# EAGLE board PCB FERNANO (EAGLE 9.7.0)
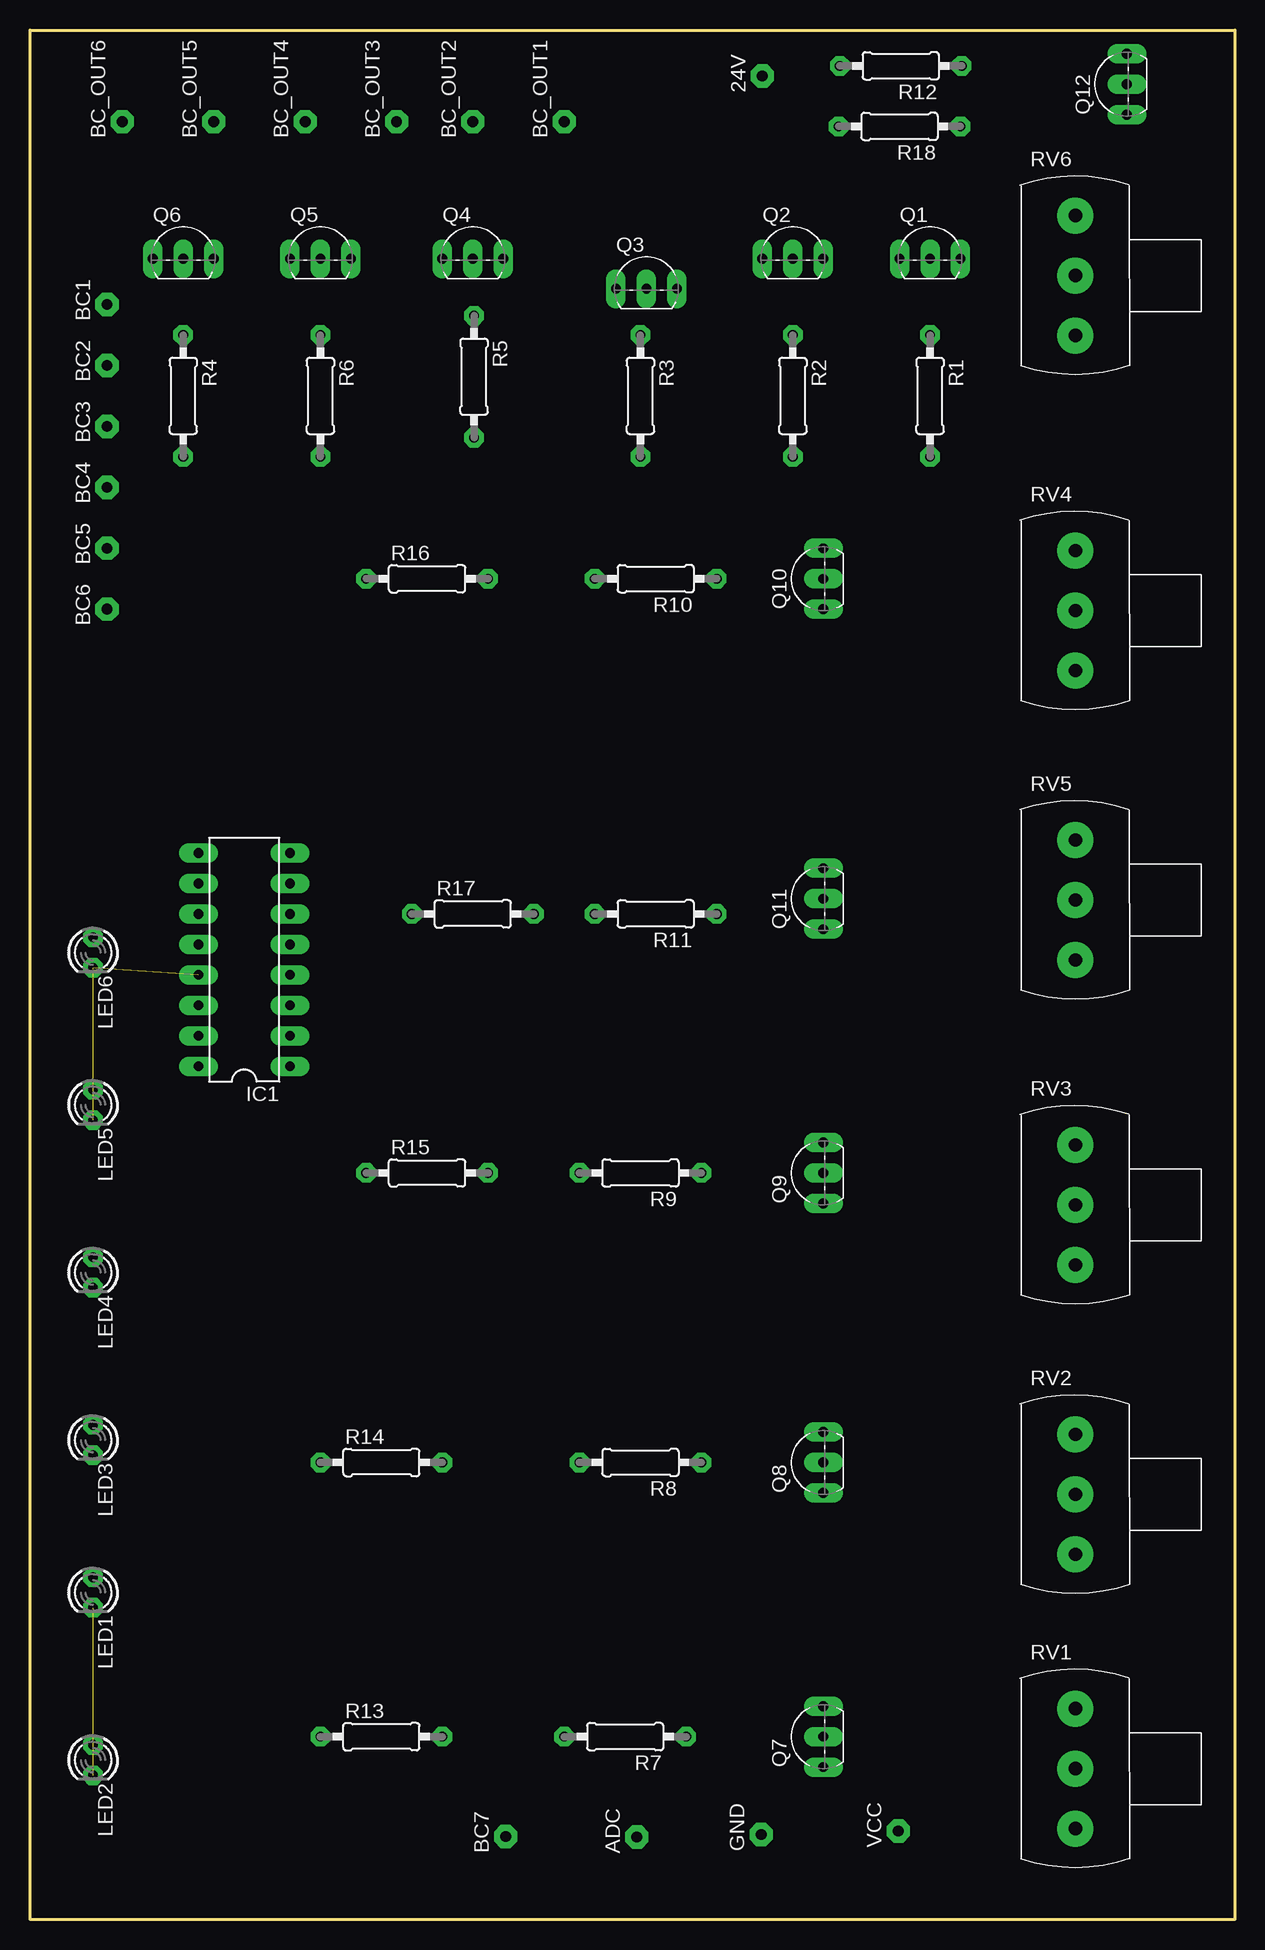
[diagram p0: board, top side]
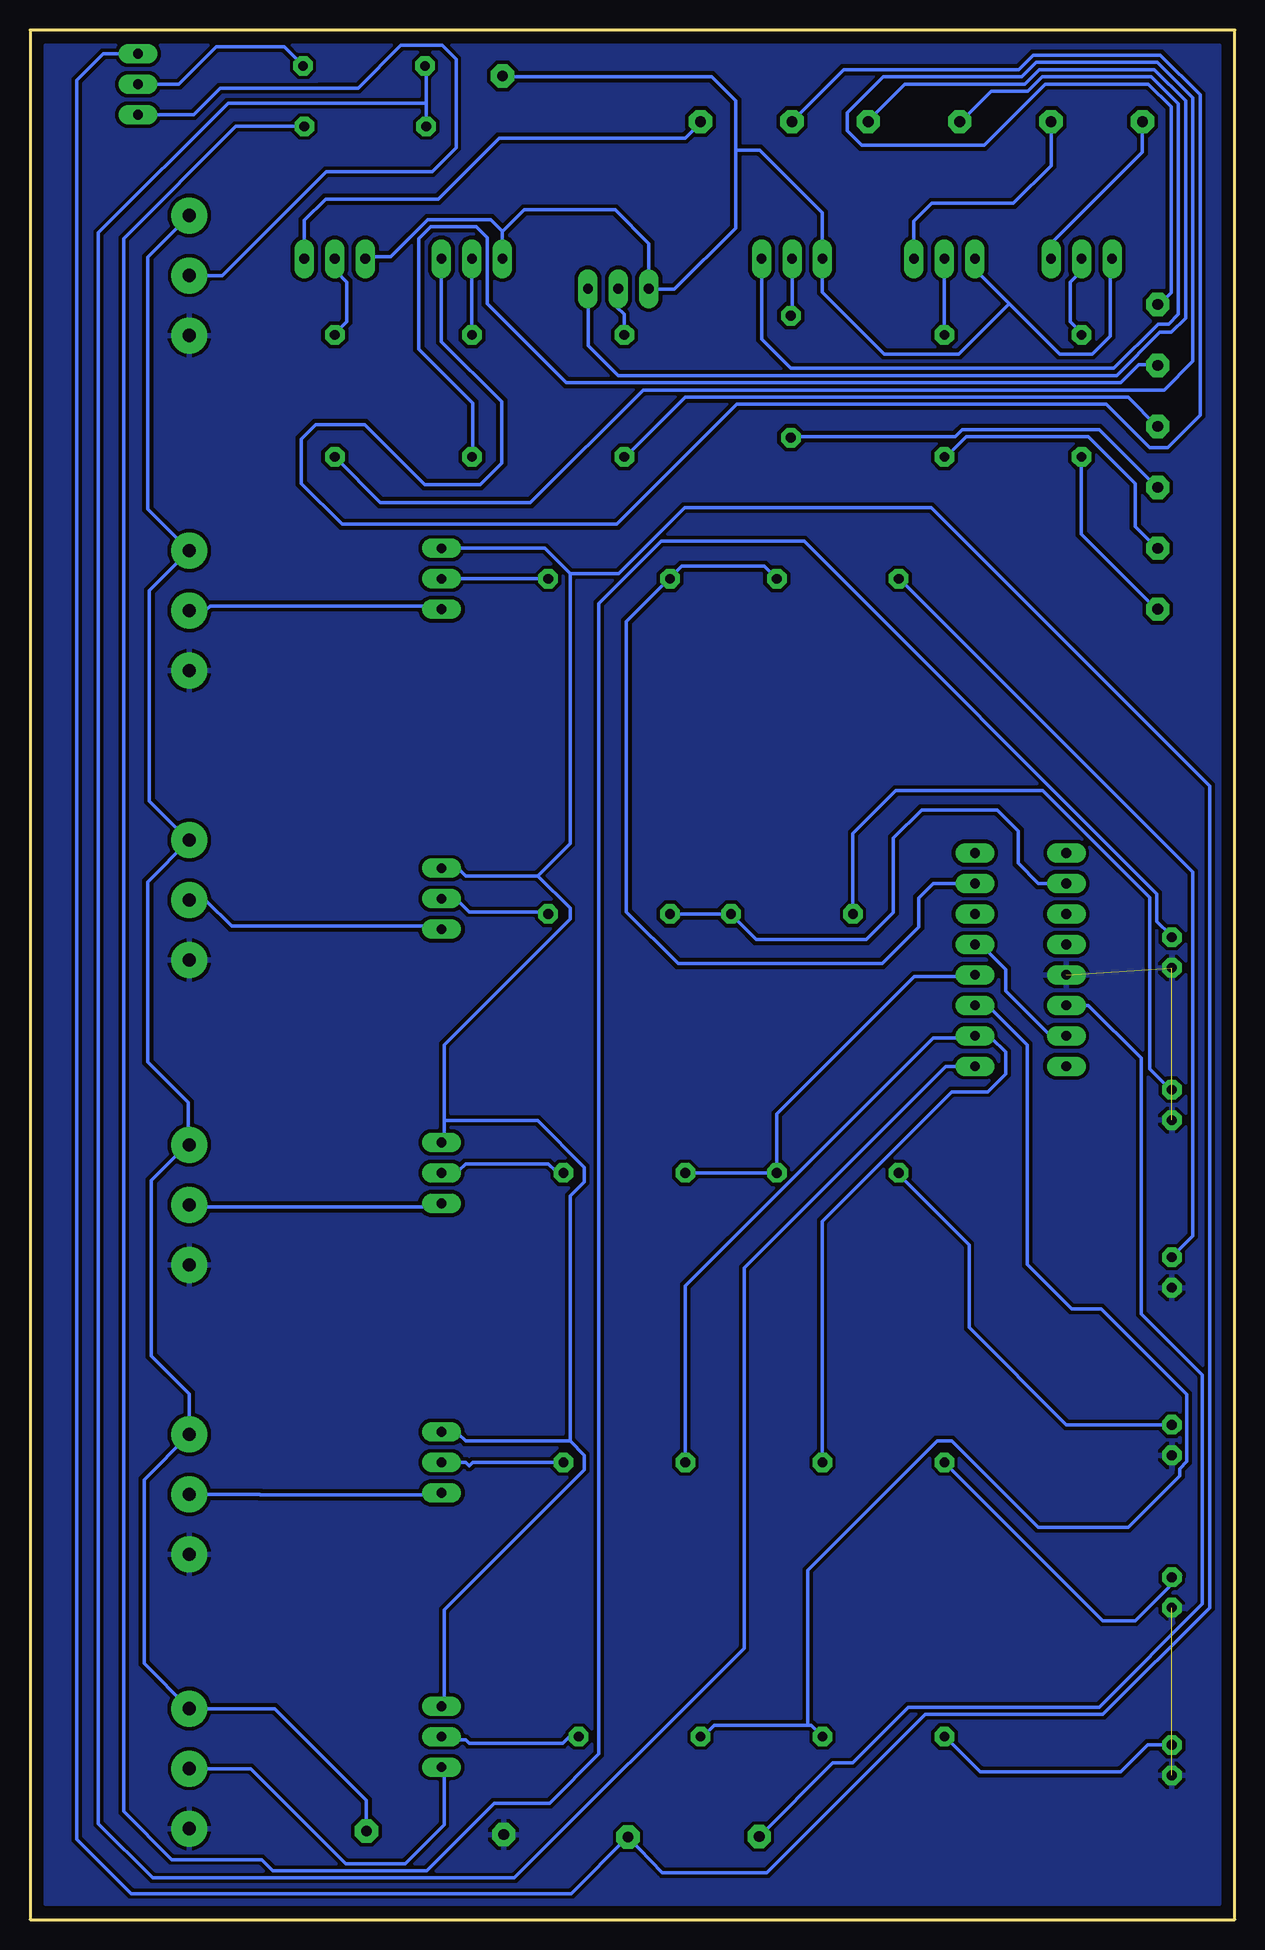
[diagram p1: board, bottom side, seen from below]

Size 100.4 x 157.5 mm. Coordinates in mm from the lower left corner, seen from the top.
Outline: 100.4,0 0,0 0,157.5 100.4,157.5 100.4,0
Copper layers (1*16): Top / Bottom
Stack-up Default Layer Stack: Top User Defined 0.035mm / Dielectric-1 User Defined 1.5mm / Bottom User Defined 0.035mm
Design rules: minimum copper width 0.3mm, minimum drill size 0.5mm, copper clearance wire_polygon to wire_polygon 0.3mm, copper clearance wire_polygon to pad_smd 0.3mm, copper clearance wire_polygon to via 0.3mm, copper clearance pad_smd to pad_smd 0.3mm, copper clearance pad_smd to via 0.3mm, copper clearance via to via 0.3mm, copper clearance smd to pad (same net) 6mil, copper clearance smd to via (same net) 6mil, copper clearance smd to smd (same net) 6mil, dimension clearance 40mil, restrict clearance 0mil, via restrict clearance 0mil, drill distance 0.2mm, keepout clearance 0mil

## Footprints (pad centres in the part's own frame; a part is rotated, then mirrored left to right if it is on the bottom)
PIN = drill 0.9 pad 1.93 octagon: 1 0,0
DIL16 = drill 0.813 long: 1 -8.89,-3.81; 2 -6.35,-3.81; 3 -3.81,-3.81; 4 -1.27,-3.81; 5 1.27,-3.81; 6 3.81,-3.81; 7 6.35,-3.81; 8 8.89,-3.81; 9 8.89,3.81; 10 6.35,3.81; 11 3.81,3.81; 12 1.27,3.81; 13 -1.27,3.81; 14 -3.81,3.81; 15 -6.35,3.81; 16 -8.89,3.81
LED3MM = drill 0.813 octagon: A -1.27,0; K 1.27,0
TO92-EBC = drill 0.813 long: B 0,-1.27; C -2.54,-1.27; E 2.54,-1.27
0207/10 = drill 0.813 octagon: 1 -5.08,0; 2 5.08,0
POTENCIOMETRO = drill 1.1 pad 3: P$1 4.5,12.5; P$2 4.5,7.5; P$3 4.5,2.5

## Placement (x,y rotation side)
24V  TESTPOINT  [PIN]  61.03,153.67 90 top
ADC  TESTPOINT  [PIN]  50.57,6.88 90 top
BC1  TESTPOINT  [PIN]  6.42,134.62 90 top
BC2  TESTPOINT  [PIN]  6.42,129.54 90 top
BC3  TESTPOINT  [PIN]  6.42,124.46 90 top
BC4  TESTPOINT  [PIN]  6.42,119.38 90 top
BC5  TESTPOINT  [PIN]  6.42,114.3 90 top
BC6  TESTPOINT  [PIN]  6.42,109.22 90 top
BC7  TESTPOINT  [PIN]  39.64,6.91 90 top
BC_OUT1  TESTPOINT  [PIN]  44.52,149.86 90 top
BC_OUT2  TESTPOINT  [PIN]  36.9,149.86 90 top
BC_OUT3  TESTPOINT  [PIN]  30.55,149.86 90 top
BC_OUT4  TESTPOINT  [PIN]  22.93,149.86 90 top
BC_OUT5  TESTPOINT  [PIN]  15.31,149.86 90 top
BC_OUT6  TESTPOINT  [PIN]  7.69,149.86 90 top
GND  TESTPOINT  [PIN]  60.93,7.08 90 top
IC1  4017N  [DIL16]  17.85,80.01 90 top
LED1  [LED3MM]  5.25,27.26 270 top
LED2  [LED3MM]  5.25,13.29 270 top
LED3  [LED3MM]  5.25,39.96 270 top
LED4  [LED3MM]  5.25,53.93 270 top
LED5  [LED3MM]  5.25,67.9 270 top
LED6  [LED3MM]  5.25,80.6 270 top
Q1  BC548  [TO92-EBC]  75,139.7 0 top
Q2  BC548  [TO92-EBC]  63.57,139.7 0 top
Q3  BC548  [TO92-EBC]  51.37,137.2 0 top
Q4  BC548  [TO92-EBC]  36.9,139.7 0 top
Q5  BC548  [TO92-EBC]  24.2,139.7 0 top
Q6  BC548  [TO92-EBC]  12.77,139.7 0 top
Q7  BC548  [TO92-EBC]  64.84,15.24 90 top
Q8  BC548  [TO92-EBC]  64.84,38.1 90 top
Q9  BC548  [TO92-EBC]  64.84,62.23 90 top
Q10  BC548  [TO92-EBC]  64.84,111.76 90 top
Q11  BC548  [TO92-EBC]  64.84,85.09 90 top
Q12  BC548  [TO92-EBC]  90.13,152.98 90 top
R1  [0207/10]  75,127 270 top
R2  [0207/10]  63.57,127 270 top
R3  [0207/10]  50.87,127 270 top
R4  [0207/10]  12.77,127 270 top
R5  [0207/10]  37,128.6 270 top
R6  [0207/10]  24.2,127 270 top
R7  [0207/10]  49.6,15.24 180 top
R8  [0207/10]  50.87,38.1 180 top
R9  [0207/10]  50.87,62.23 180 top
R10  [0207/10]  52.14,111.76 180 top
R11  [0207/10]  52.14,83.82 180 top
R12  [0207/10]  72.56,154.51 180 top
R13  [0207/10]  29.28,15.24 0 top
R14  [0207/10]  29.28,38.1 0 top
R15  [0207/10]  33.09,62.23 0 top
R16  [0207/10]  33.09,111.76 0 top
R17  [0207/10]  36.9,83.82 0 top
R18  [0207/10]  72.46,149.46 180 top
RV1  [POTENCIOMETRO]  82.62,5.08 0 top
RV2  [POTENCIOMETRO]  82.62,27.94 0 top
RV3  [POTENCIOMETRO]  82.62,52.07 0 top
RV4  [POTENCIOMETRO]  82.62,101.6 0 top
RV5  [POTENCIOMETRO]  82.62,77.47 0 top
RV6  [POTENCIOMETRO]  82.62,129.54 0 top
VCC  TESTPOINT  [PIN]  72.36,7.38 90 top

## Library data of the parts
24V ADC BC1-BC7 BC_OUT1-BC_OUT6 GND RV1-RV6 VCC = WS_Kazan_2019
IC1 = 40xx; SPICEPREFIX: X
LED1-LED6 = led
Q1-Q12 = transistor-npn
R1-R18 = rcl; SPICEPREFIX: R

## Nets
GND: GND.1 IC1.13 LED1.K LED2.K LED3.K LED4.K LED5.K LED6.K RV1.P$3 RV2.P$3 RV3.P$3 RV4.P$3 RV5.P$3 RV6.P$3
N$1: BC5.1 R6.2
N$2: BC4.1 R5.2
N$3: Q4.B R5.1
N$4: Q5.B R6.1
N$5: BC3.1 R3.2
N$6: Q3.B R3.1
N$7: BC2.1 R2.2
N$8: Q2.B R2.1
N$9: BC1.1 R1.2
N$10: Q1.B R1.1
N$11: BC6.1 R4.2
N$12: Q6.B R4.1
N$13: 24V.1 Q1.C Q2.C Q3.C Q4.C Q5.C Q6.C
N$14: BC_OUT2.1 Q2.E
N$15: BC_OUT3.1 Q3.E
N$16: BC_OUT4.1 Q4.E
N$17: BC_OUT5.1 Q5.E
N$18: BC_OUT6.1 Q6.E
N$19: BC_OUT1.1 Q1.E
N$20: BC7.1 IC1.14
N$22: LED2.A R13.1
N$23: LED1.A R14.1
N$24: Q10.B R10.1
N$25: Q11.B R11.1
N$26: LED3.A R15.1
N$27: Q9.B R9.1
N$28: LED4.A R16.1
N$29: Q8.B R8.1
N$30: LED5.A R17.1
N$31: Q7.B R7.1
N$32: IC1.3 R7.2 R13.2
N$33: Q12.B R12.1
N$34: ADC.1 Q7.E Q8.E Q9.E Q10.E Q11.E Q12.E
N$35: Q7.C RV1.P$2
N$36: Q8.C RV2.P$2
N$37: Q9.C RV3.P$2
N$38: Q10.C RV4.P$2
N$39: Q11.C RV5.P$2
N$40: Q12.C RV6.P$2
N$41: IC1.2 R8.2 R14.2
N$42: IC1.4 R9.2 R15.2
N$43: IC1.7 R10.2 R16.2
N$44: IC1.10 R11.2 R17.2
N$45: LED6.A R18.1
N$46: IC1.1 R12.2 R18.2
N$48: IC1.5 IC1.15
N$53: RV1.P$1 RV2.P$1 RV3.P$1 RV4.P$1 RV5.P$1 RV6.P$1 VCC.1
VDD: IC1.16
VSS: IC1.8

## Tracks (layer width: path | path; a pad name or v marks a point on that pad's centre or on a via)
GND  (3 unrouted)
  pour Bottom (isolate 0.3): 0,0 0,157.5 100.4,157.5 100.4,0
N$1
  Bottom 0.3: R6.2 24.2,122.1 23.9,122.1 22.4,123.6 12.2,123.6 8.3,119.7 8.3,116.1 6.5,114.3 BC5.1
N$2
  Bottom 0.3: R5.2 36.8,123.6 23.3,123.6 22.7,124.2 11.3,124.2 6.5,119.4 BC4.1
N$3
  Bottom 0.3: Q4.B 36.9,133.78 R5.1
N$4
  Bottom 0.3: Q5.B R6.1
N$5
  Bottom 0.3: R3.2 50.6,122.1 45.8,126.9 8.9,126.9 6.5,124.5 BC3.1
N$6
  Bottom 0.3: R3.1 50.9,132.3 50.9,133.8 51.5,134.4 51.5,135.9 Q3.B
N$7
  Bottom 0.3: R2.2 63.5,122.1 63.5,126.4 68,130.9 68,140.1 67,141.1 63.2,141.1 62.3,140.2 62.3,134.7 55.7,128.1 9.5,128.1 8,129.6 6.5,129.6 BC2.1
N$8
  Bottom 0.3: R2.1 Q2.B
N$9
  Bottom 0.3: R1.2 74.9,121.8 71.2,118.1 58.7,118.1 49.3,127.5 5.9,127.5 3.5,129.9 3.5,151.85 6.45,154.8 16.55,154.8 17.75,153.6 29.3,153.6 32.3,150.6 32.3,149.1 31.1,147.9 20.9,147.9 15.8,153 7.2,153 5.3,151.1 5.3,135.6 6.2,134.7 BC1.1
N$10
  Bottom 0.3: R1.1 74.9,132.3 74,133.2 74,136.5 74.9,137.4 74.9,138.3 Q1.B
N$11
  Bottom 0.3: R4.2 12.8,121.8 12.8,115.5 6.5,109.2 BC6.1
N$12
  Bottom 0.3: R4.1 12.8,132.3 13.7,133.2 13.7,136.5 12.8,137.4 12.8,138.3 Q6.B
N$13
  Bottom 0.3: 18.8,134.7 14.6,130.5 11.9,130.5 10.4,132 10.4,138.3 Q6.C | 18.8,134.7 21.5,137.4 21.5,138.3 Q5.C | Q1.C 72.2,138.6 70.35,138.6 67.25,141.7 62,141.7 61.03,140.73 61.03,140.68 | 41.6,147.5 41.6,141 46.7,135.9 48.8,135.9 Q3.C 48.83,139.69 51.65,142.51 59.21,142.51 61.03,140.68 | 41.6,147.5 41.6,151.6 43.6,153.6 60.8,153.6 24V.1 | 18.8,134.7 23,130.5 29.2,130.5 34.36,135.66 Q4.C 34.36,142.26 39.6,147.5 41.6,147.5 | Q2.C 61.03,140.68
N$14
  Bottom 0.3: BC_OUT2.1 36.8,150 32.6,154.2 17.99,154.2 16.79,155.4 6.21,155.4 2.9,152.09 2.9,125.4 5.6,122.7 7.1,122.7 10.7,126.3 41.5,126.3 51.5,116.3 74.4,116.3 77.8,119.7 77.8,123.4 76.6,124.6 72.5,124.6 67.5,119.6 62.9,119.6 61.1,121.4 61.1,126.52 66.11,131.53 Q2.E
N$15
  Bottom 0.3: Q3.E 53.9,135.9 53.9,131.2 51.4,128.7 9.85,128.7 6.25,132.3 5.3,132.3 4.1,133.5 4.1,151.6 6.7,154.2 16.3,154.2 17.5,153 27.5,153 30.5,150 BC_OUT3.1
N$16
  Bottom 0.3: BC_OUT4.1 22.7,150 20.3,152.4 17.25,152.4 16.05,153.6 6.95,153.6 4.7,151.35 4.7,133.8 5.5,133 6.4,133 10.1,129.3 37,129.3 39.44,131.74 Q4.E
N$17
  Bottom 0.3: BC_OUT5.1 15.31,146.19 18.45,143.05 25.25,143.05 26.74,141.56 Q5.E
N$18
  Bottom 0.3: Q6.E 15.2,138.6 15.2,139.8 7.7,147.3 7.7,149.7 BC_OUT6.1
N$19
  Bottom 0.3: Q1.E 77.54,141.63 75.77,143.4 66.4,143.4 61.3,148.5 45.8,148.5 44.6,149.7 BC_OUT1.1
N$20
  Bottom 0.3: IC1.14 12.2,76.2 7.8,71.8 7.8,50.5 2.7,45.4 2.7,26.3 11.3,17.7 27.2,17.7 31.85,13.05 33.5,13.05 BC7.1
N$22
  Bottom 0.3: R13.1 24.2,15 23.9,15 21.2,12.3 9.51,12.3 7.25,14.56 LED2.A
N$23
  Bottom 0.3: R14.1 11,24.9 8.3,24.9 4.5,28.7 5.1,28.7 LED1.A
N$24
  Bottom 0.3: Q10.B R10.1
N$25
  Bottom 0.3: Q11.B 65.9,84.9 64.7,84.9 63.8,84 57.5,84 R11.1
N$26
  Bottom 0.3: R15.1 27.8,62.1 27.8,61.9 22.15,56.25 22.15,49.35 14.03,41.23 LED3.A
N$27
  Bottom 0.3: Q9.B 65.9,62.4 64.7,62.4 64.1,63 57.2,63 56.6,62.4 56,62.4 R9.1
N$28
  Bottom 0.3: LED4.A 5.1,55.4 3.5,57 3.5,87.3 27.5,111.3 27.5,111.6 27.8,111.9 R16.1
N$29
  Bottom 0.3: Q8.B 64.1,38.1 63.8,37.8 63.5,38.1 R8.1
N$30
  Bottom 0.3: LED5.A 5.4,69.2 7.1,70.9 7.1,85.2 16,94.1 28.25,94.1 31.82,90.53 R17.1
N$31
  Bottom 0.3: Q7.B 65.9,15 64.1,15 63.8,14.7 56,14.7 55.4,15.3 54.8,15.3 R7.1
N$32
  Bottom 0.3: 35.6,16.2 35.3,16.2 34.4,15.3 R13.2 | 35.6,16.2 43.4,16.2 44.3,15.3 R7.2 | IC1.3 20.6,76.2 17.3,72.9 17.3,54.6 13.6,50.9 11.13,50.9 3.99,43.75 3.99,38.17 4.6,37.55 4.6,37 8.9,32.7 16.4,32.7 23.6,39.9 24.8,39.9 35.6,29.1 35.6,16.2
N$33
  Bottom 0.3: R12.1 79.21,156.08 84.9,156.08 88,152.98 Q12.B
N$34
  Bottom 0.3: 55.4,39.9 54.2,38.7 54.2,37.5 65.9,25.8 65.9,18 Q7.E | 55.4,39.9 64.1,39.9 64.7,40.5 65.9,40.5 Q8.E | 65.9,66.6 65.9,72.9 55.4,83.4 55.4,84.3 58.1,87 | 65.9,66.6 65.9,64.8 Q9.E | 58.1,87 64.1,87 64.7,87.6 65.9,87.6 Q11.E | 55.4,112.2 55.4,89.7 58.1,87 | 55.4,39.9 55.4,60.3 54.2,61.5 54.2,62.7 58.1,66.6 65.9,66.6 | 55.4,112.2 51.35,112.2 45.85,117.7 25.3,117.7 2.1,94.5 2.1,26 11,17.1 25.8,17.1 39,3.9 47.7,3.9 ADC.1 55.28,2.17 91.97,2.17 96.5,6.7 96.5,153.3 94.28,155.52 Q12.E | Q10.E 57.5,114.3 55.4,112.2
N$35
  Bottom 0.3: Q7.C 65.9,12.6 65.9,7.9 69.13,4.67 74.11,4.67 82.02,12.58 RV1.P$2
N$36
  Bottom 0.3: Q8.C 66.2,35.4 81.2,35.4 81.24,35.44 RV2.P$2
N$37
  Bottom 0.3: Q9.C 66.2,59.4 86.9,59.4 RV3.P$2
N$38
  Bottom 0.3: Q10.C 66.2,109.5 85.4,109.5 85.7,109.2 86.9,109.2 RV4.P$2
N$39
  Bottom 0.3: Q11.C 66.2,82.8 83.6,82.8 85.7,84.9 86.9,84.9 RV5.P$2
N$40
  Bottom 0.3: RV6.P$2 84.36,137.04 75.7,145.7 66.9,145.7 64.9,147.7 64.9,155.06 66.05,156.21 69.49,156.21 73.05,152.65 76.18,152.65 84.55,152.65 86.76,150.44 Q12.C
N$41
  Bottom 0.3: R8.2 45.8,52.81 25.11,73.5 21.8,73.5 IC1.2 21.5,73.5 20.3,73.5 19.1,72.3 19.1,70.5 20.6,69 23.6,69 34.4,58.2 34.4,38.1 R14.2
N$42
  Bottom 0.3: IC1.4 21.8,78.6 26.7,78.6 38.17,67.13 R15.2 R9.2
N$43
  Bottom 0.3: 47,111.9 46.1,112.8 39.2,112.8 38.3,111.9 R16.2 | 47,111.9 R10.2 | IC1.7 25.14,86.36 26.35,85.15 26.35,82.75 29.4,79.7 46.4,79.7 50.7,84 50.7,108.2 47,111.9
N$44
  Bottom 0.3: R11.2 R17.2 41.9,83.7 39.9,81.7 30.7,81.7 28.45,83.95 28.45,90.15 26.1,92.5 19.8,92.5 18.05,90.75 18.05,88.05 16.36,86.36 IC1.10
N$45
  Bottom 0.3: LED6.A 5.4,82.1 6.5,83.2 6.5,85.5 35.9,114.9 47.8,114.9 53,109.7 53,13.8 57.1,9.7 61.72,9.7 67.34,4.07 80.17,4.07 81.1,5 88.6,5 92.6,9 92.6,140.1 83.24,149.46 R18.1
N$46
  Bottom 0.3: 67.4,151.4 67.4,153.67 R12.2 | 67.4,151.4 67.4,149.6 R18.2 | 67.4,151.4 83.9,151.4 94.7,140.6 94.7,8 90.17,3.47 60.03,3.47 40.9,22.6 40.9,54.3 24.08,71.12 IC1.1
N$48
  Bottom 0.3: IC1.15 14.3,73.8 15.5,73.8 19.1,77.4 19.1,79.2 20.9,81 21.5,81 IC1.5
N$53
  Bottom 0.3: RV6.P$1 90.6,138.56 90.6,117.58 RV4.P$1 90.45,110.77 90.45,93.25 87.2,90 RV5.P$1 90.6,86.5 90.6,71.5 87.2,68.1 87.2,64.8 RV3.P$1 87.33,64.57 90.3,61.6 90.3,47 87.12,43.82 RV2.P$1 90.9,36.66 90.9,21.36 RV1.P$1 80.02,17.58 72.36,9.92 VCC.1